# EAGLE board 8-Fach-PCB v33 (EAGLE 9.7.0)
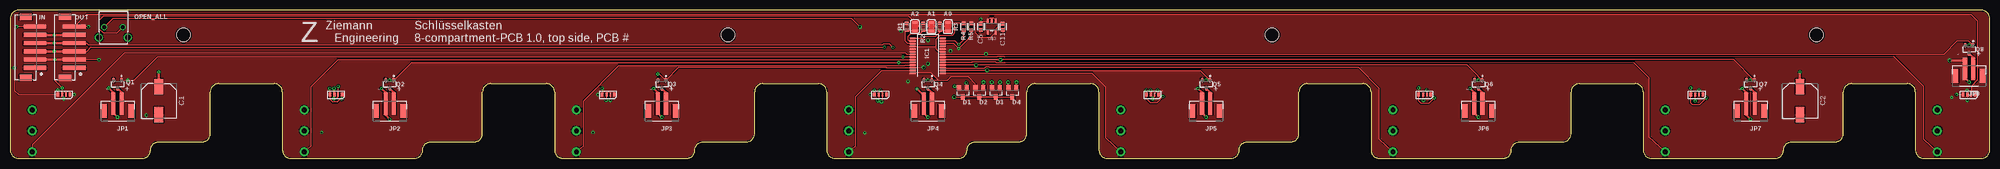
[diagram p0: board, top side]
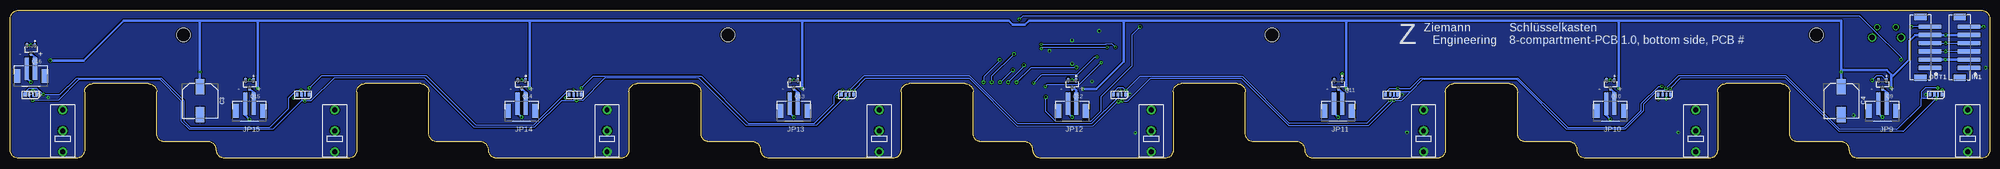
[diagram p1: board, bottom side, seen from below]

Size 480 x 36 mm. Coordinates in mm from the lower left corner, seen from the top.
Outline: 432,4 442.5,4 arc90 444.5,6 444.5,16.16 arc-90 446.5,18.16 460,18.16 arc-90 462,16.16 462,2 arc90 464,0 478,0 arc90 480,2 480,34 arc90 478,36 2,36 arc90 0,34 0,2 arc90 2,0 32,0 arc90 34,2 arc-90 36,4 46.5,4 arc90 48.5,6 48.5,16.16 arc-90 50.5,18.16 64,18.16 arc-90 66,16.16 66,2 arc90 68,0 98,0 arc90 100,2 arc-90 102,4 112.5,4 arc90 114.5,6 114.5,16.16 arc-90 116.5,18.16 130,18.16 arc-90 132,16.16 132,2 arc90 134,0 164,0 arc90 166,2 arc-90 168,4 178.5,4 arc90 180.5,6 180.5,16.16 arc-90 182.5,18.16 196,18.16 arc-90 198,16.16 198,2 arc90 200,0 230,0 arc90 232,2 arc-90 234,4 244.5,4 arc90 246.5,6 246.5,16.16 arc-90 248.5,18.16 262,18.16 arc-90 264,16.16 264,2 arc90 266,0 296,0 arc90 298,2 arc-90 300,4 310.5,4 arc90 312.5,6 312.5,16.16 arc-90 314.5,18.16 328,18.16 arc-90 330,16.16 330,2 arc90 332,0 362,0 arc90 364,2 arc-90 366,4 376.5,4 arc90 378.5,6 378.5,16.16 arc-90 380.5,18.16 394,18.16 arc-90 396,16.16 396,2 arc90 398,0 428,0 arc90 430,2 arc-90 432,4
Copper layers (1*16): Top / Bottom
Stack-up Default Layer Stack: Top User Defined 0.035mm / Dielectric-1 User Defined 1.5mm / Bottom User Defined 0.035mm
Design rules "aisler_2_layer_simple *": minimum track width 0.2mm, minimum drill 0.3mm, track to track 0.175mm, track to pad 0.175mm, pad to pad 0.175mm, via to via 0.175mm, smd to smd 0.175mm, copper to edge 0.3mm, drill to drill 0.25mm, minimum pad ring 0.2mm, minimum via ring 0.2mm, stop-mask expansion 0mil, vias tented up to drill 0mil, thermal gap 10mil
Holes 3.3 mm at 42,30 174,30 306,30 438,30

## Footprints (pad centres in the part's own frame; a part is rotated, then mirrored left to right if it is on the bottom)
SOLDERJUMPER_ARROW_NOPASTE = smd 0.762 x 1.524: 1 -1.016,0; 2 1.016,0
CAPAE830X1050N = smd 3.764 x 2.115: 1 -3.426,0; 2 3.426,0
CAPC1608X85 = smd 0.921 x 0.97: 1 -0.775,0; 2 0.775,0
SOT23 = smd 1 x 1.4: 1 -0.95,-1.1; 2 0.95,-1.1; 3 0,1.1
SSOP28 = smd 0.4 x 1.5: 1 -4.225,-3.625; 2 -3.575,-3.625; 3 -2.925,-3.625; 4 -2.275,-3.625; 5 -1.625,-3.625; 6 -0.975,-3.625; 7 -0.325,-3.625; 8 0.325,-3.625; 9 0.975,-3.625; 10 1.625,-3.625; 11 2.275,-3.625; 12 2.925,-3.625; 13 3.575,-3.625; 14 4.225,-3.625; 15 4.225,3.625; 16 3.575,3.625; 17 2.925,3.625; 18 2.275,3.625; 19 1.625,3.625; 20 0.975,3.625; 21 0.325,3.625; 22 -0.325,3.625; 23 -0.975,3.625; 24 -1.625,3.625; 25 -2.275,3.625; 26 -2.925,3.625; 27 -3.575,3.625; 28 -4.225,3.625
JST_B6B-PH-SM4-TB(LF)(SN) = smd 1 x 5.5: 1 -5,0; 2 -3,0; 3 -1,0; 4 1,0; 5 3,0; 6 5,0 | smd 1.6 x 3: P1 -7.4,2.25; P2 7.4,2.25
JST-PH-2-SMT = smd 1 x 5.5: 1 -1,-1.8; 2 1,-1.8 | smd 1.6 x 3.4: NC1 -3.4,0; NC2 3.4,0
4020 = smd 0.75 x 0.8: DIN 0,0 | smd 0.4 x 0.8: DOUT 2.005,0 | smd 0.8 x 0.8: GND 2.985,0 | smd 0.6 x 0.8: VDD 1.125,0
1571610-2 = drill 1: 1 -2.25,0; 2 2.25,0 | drill 1.3: 3 -3.5,-2.5; 4 3.5,-2.5
SOT23-3 = smd 0.62 x 1.1: 1 -0.95,-0.975; 2 0.95,-0.975; 3 0,0.975
RESC1608X60 = smd 0.799 x 0.974: 1 -0.815,0; 2 0.815,0
OMRON_D2F = drill 1.2 pad 2.184: P$1 -5.08,0; P$2 0,0; P$3 5.08,0
SOT23-5 = smd 0.55 x 1.2: 1 -0.95,-1.3; 2 0,-1.3; 3 0.95,-1.3; 4 0.95,1.3; 5 -0.95,1.3

## Placement (x,y rotation side)
A0  [SOLDERJUMPER_ARROW_NOPASTE]  227.4,32 90 top
A1  [SOLDERJUMPER_ARROW_NOPASTE]  223.4,32 90 top
A2  [SOLDERJUMPER_ARROW_NOPASTE]  219.36,32 90 top
C1  [CAPAE830X1050N]  36,14 270 top
C2  [CAPAE830X1050N]  434,14 270 top
C3  [CAPAE830X1050N]  434,14 270 bottom
C4  [CAPAE830X1050N]  36,14 270 bottom
C5  1u  [CAPC1608X85]  235.3,32 90 top
C11  1u  [CAPC1608X85]  240.7,32 90 top
D1  BAT54A  [SOT23]  231,16 180 top
D2  BAT54A  [SOT23]  235,16 180 top
D3  BAT54A  [SOT23]  239,16 180 top
D4  BAT54A  [SOT23]  243,16 180 top
IC1  MCP23017SS  [SSOP28]  222.5,24.93 90 top
IN  B6B-PH-SM4-TB(LF)(SN)  [JST_B6B-PH-SM4-TB(LF)(SN)]  6,27 90 top
IN1  B6B-PH-SM4-TB(LF)(SN)  [JST_B6B-PH-SM4-TB(LF)(SN)]  5,27 90 bottom
JP1  [JST-PH-2-SMT]  26,11.5 180 top
JP2  [JST-PH-2-SMT]  92,11.5 180 top
JP3  [JST-PH-2-SMT]  158,11.5 180 top
JP4  [JST-PH-2-SMT]  222.5,11.5 180 top
JP5  [JST-PH-2-SMT]  290,11.5 180 top
JP6  [JST-PH-2-SMT]  356,11.5 180 top
JP7  [JST-PH-2-SMT]  422,11.5 180 top
JP8  [JST-PH-2-SMT]  475,20 180 top
JP9  [JST-PH-2-SMT]  26,11.5 180 bottom
JP10  [JST-PH-2-SMT]  92,11.5 180 bottom
JP11  [JST-PH-2-SMT]  158,11.5 180 bottom
JP12  [JST-PH-2-SMT]  222.5,11.5 180 bottom
JP13  [JST-PH-2-SMT]  290,11.5 180 bottom
JP14  [JST-PH-2-SMT]  356,11.5 180 bottom
JP15  [JST-PH-2-SMT]  422,11.5 180 bottom
JP16  [JST-PH-2-SMT]  475,20 180 bottom
LED1  SK6812  [4020]  11.5,15.5 0 top
LED2  SK6812  [4020]  77.5,15.5 0 top
LED3  SK6812  [4020]  143.5,15.5 0 top
LED4  SK6812  [4020]  209.5,15.5 0 top
LED5  SK6812  [4020]  275.5,15.5 0 top
LED6  SK6812  [4020]  341.5,15.5 0 top
LED7  SK6812  [4020]  407.5,15.5 0 top
LED8  SK6812  [4020]  473.5,15.5 0 top
LED9  SK6812  [4020]  80.4,15.5 0 bottom
LED10  SK6812  [4020]  14.5,15.5 0 bottom
LED11  SK6812  [4020]  146.5,15.5 0 bottom
LED12  SK6812  [4020]  212.5,15.5 0 bottom
LED13  SK6812  [4020]  278.5,15.5 0 bottom
LED14  SK6812  [4020]  344.5,15.5 0 bottom
LED15  SK6812  [4020]  410.5,15.5 0 bottom
LED16  SK6812  [4020]  476.5,15.5 0 bottom
OPEN_ALL  1571610-2  [1571610-2]  25,31.88 0 top
OUT  B6B-PH-SM4-TB(LF)(SN)  [JST_B6B-PH-SM4-TB(LF)(SN)]  15.5,27 90 top
OUT1  B6B-PH-SM4-TB(LF)(SN)  [JST_B6B-PH-SM4-TB(LF)(SN)]  14.5,27 90 bottom
Q1  MOSFET-N  [SOT23-3]  26,18 180 top
Q2  MOSFET-N  [SOT23-3]  92,18 180 top
Q3  MOSFET-N  [SOT23-3]  158,18 180 top
Q4  MOSFET-N  [SOT23-3]  222.5,18 180 top
Q5  MOSFET-N  [SOT23-3]  290,18 180 top
Q6  MOSFET-N  [SOT23-3]  356,18 180 top
Q7  MOSFET-N  [SOT23-3]  422,18 180 top
Q8  MOSFET-N  [SOT23-3]  475,26.5 180 top
Q9  MOSFET-N  [SOT23-3]  26,18 180 bottom
Q10  MOSFET-N  [SOT23-3]  92,18 180 bottom
Q11  MOSFET-N  [SOT23-3]  158,18 180 bottom
Q12  MOSFET-N  [SOT23-3]  222.5,18 180 bottom
Q13  MOSFET-N  [SOT23-3]  290,18 180 bottom
Q14  MOSFET-N  [SOT23-3]  356,18 180 bottom
Q15  MOSFET-N  [SOT23-3]  422,18 180 bottom
Q16  MOSFET-N  [SOT23-3]  475,26.5 180 bottom
R1  10k  [RESC1608X60]  217.4,32 270 top
R2  10k  [RESC1608X60]  221.4,32 270 top
R3  10k  [RESC1608X60]  225.4,32 270 top
R4  10k  [RESC1608X60]  231.2,32 90 top
R5  10k  [RESC1608X60]  233,32 90 top
S1  SWITCH_SPST  [OMRON_D2F]  5.3,6.7 90 bottom
S2  SWITCH_SPST  [OMRON_D2F]  71.3,6.7 90 bottom
S3  SWITCH_SPST  [OMRON_D2F]  137.3,6.7 90 bottom
S4  SWITCH_SPST  [OMRON_D2F]  203.3,6.7 90 bottom
S5  SWITCH_SPST  [OMRON_D2F]  269.3,6.7 90 bottom
S6  SWITCH_SPST  [OMRON_D2F]  335.3,6.7 90 bottom
S7  SWITCH_SPST  [OMRON_D2F]  401.3,6.7 90 bottom
S8  SWITCH_SPST  [OMRON_D2F]  467.3,6.7 90 bottom
U$1  [ZELOGO_NAME]  73.1,28.3 0 top
U$2  [ZELOGO_NAME]  140.6,27.8 0 bottom
U$3  MIC550XSOT-23-5  [SOT23-5]  238,32 180 top

## Library data of the parts
A0 A1 A2 = microbuilder; BOM: EXCLUDE
C1-C5 C11 = Capacitor; CATEGORY: Capacitor
D1-D4 = diode
IC1 = adafruit
IN IN1 OUT OUT1 = B6B-PH-SM4-TB_LF__SN_; MANUFACTURER: JST
JP1-JP16 LED1-LED16 U$3 = MAS AT PCB library v11
OPEN_ALL = Switch; CREATED_BY: PCBLayout.com; DIGIKEY_PN: A117269-ND; MANUFACTURER: TE Connectivity ALCOSWITCH Switches; MPN: 1571610-2
Q1-Q16 = MAS AT PCB library; CREATED_BY: PCBLayout.com; DIGIKEY_PART_NUMBER: 1727-2764-1-ND; MANUFACTURER: Nexperia USA Inc.; MPN: 2N7002,215; PACKAGE: SOT-23-3
R1-R5 = Resistor; CATEGORY: Resistor; SUB-CATEGORY: Fixed
S1-S8 = ZE PCB lib v51
U$1 U$2 = ZE PCB lib

## Nets
3V3: A0.2 A1.2 A2.2 C11.2 IC1.9 IC1.18 OPEN_ALL.2 R4.2 R5.2 U$3.5
5V: C5.2 IN1.2 IN.2 LED1.VDD LED2.VDD LED3.VDD LED4.VDD LED5.VDD LED6.VDD LED7.VDD LED8.VDD LED9.VDD LED10.VDD LED11.VDD LED12.VDD LED13.VDD LED14.VDD LED15.VDD LED16.VDD OUT1.2 OUT.2 U$3.1 U$3.3
A0: A0.1 IC1.15 R3.2
A1: A1.1 IC1.16 R2.2
A2: A2.1 IC1.17 R1.2
GND: C1.2 C2.2 C3.2 C4.2 C5.1 C11.1 IC1.10 IN1.1 IN.1 LED1.GND LED2.GND LED3.GND LED4.GND LED5.GND LED6.GND LED7.GND LED8.GND LED9.GND LED10.GND LED11.GND LED12.GND LED13.GND LED14.GND LED15.GND LED16.GND OPEN_ALL.3 OPEN_ALL.4 OUT1.1 OUT.1 Q1.2 Q2.2 Q3.2 Q4.2 Q5.2 Q6.2 Q7.2 Q8.2 Q9.2 Q10.2 Q11.2 Q12.2 Q13.2 Q14.2 Q15.2 Q16.2 R1.1 R2.1 R3.1 S1.P$2 S2.P$2 S3.P$2 S4.P$2 S5.P$2 S6.P$2 S7.P$2 S8.P$2 U$3.2
I1: IC1.21 S1.P$1
I2: IC1.23 S2.P$1
I3: IC1.25 S3.P$1
I4: IC1.27 S4.P$1
I5: IC1.1 S5.P$1
I6: IC1.3 S6.P$1
I7: IC1.5 S7.P$1
I8: IC1.7 S8.P$1
LED_IN: IN1.6 IN.6 LED1.DIN LED10.DIN
LED_OUT: LED8.DOUT LED16.DOUT OUT1.6 OUT.6
N$1: JP2.1 Q2.3
N$2: D1.3 D2.3 D3.3 D4.3 OPEN_ALL.1
N$3: JP3.1 Q3.3
N$4: JP1.1 Q1.3
N$5: LED7.DOUT LED8.DIN LED15.DOUT LED16.DIN
N$6: LED6.DOUT LED7.DIN LED14.DOUT LED15.DIN
N$9: JP4.1 Q4.3
N$10: JP5.1 Q5.3
N$11: JP6.1 Q6.3
N$12: JP7.1 Q7.3
N$13: JP8.1 Q8.3
N$19: JP9.1 Q9.3
N$20: JP10.1 Q10.3
N$21: JP11.1 Q11.3
N$22: JP12.1 Q12.3
N$23: JP13.1 Q13.3
N$24: JP14.1 Q14.3
N$25: JP15.1 Q15.3
N$26: JP16.1 Q16.3
N$32: LED1.DOUT LED2.DIN LED9.DIN LED10.DOUT
N$34: LED5.DOUT LED6.DIN LED13.DOUT LED14.DIN
N$35: LED4.DOUT LED5.DIN LED12.DOUT LED13.DIN
N$36: LED2.DOUT LED3.DIN LED9.DOUT LED11.DIN
N$37: LED3.DOUT LED4.DIN LED11.DOUT LED12.DIN
O1: D1.1 IC1.22 Q1.1 Q9.1
O2: D1.2 IC1.24 Q2.1 Q10.1
O3: D2.1 IC1.26 Q3.1 Q11.1
O4: D2.2 IC1.28 Q4.1 Q12.1
O5: D3.1 IC1.2 Q5.1 Q13.1
O6: D3.2 IC1.4 Q6.1 Q14.1
O7: D4.1 IC1.6 Q7.1 Q15.1
O8: D4.2 IC1.8 Q8.1 Q16.1
SCL: IC1.12 IN1.4 IN.4 OUT1.4 OUT.4 R5.1
SDA: IC1.13 IN1.3 IN.3 OUT1.3 OUT.3 R4.1
V+: C1.1 C2.1 C3.1 C4.1 IN1.5 IN.5 JP1.2 JP2.2 JP3.2 JP4.2 JP5.2 JP6.2 JP7.2 JP8.2 JP9.2 JP10.2 JP11.2 JP12.2 JP13.2 JP14.2 JP15.2 JP16.2 OUT1.5 OUT.5

## Tracks (layer width: path | path; a pad name or v marks a point on that pad's centre or on a via)
3V3
  Top 0.3: U$3.5 237.75,29.5 235.12,29.5 233.89,30.73 233.89,31.93 R5.2 R4.2 231,33.02 229,33.02 | U$3.5 239.07,30.7 | C11.2 239.82,31.9 239.4,31.9 238.95,31.45 U$3.5 | 229,33.02 A0.2 226.38,32 224.42,32 A1.2 223.4,32.9 222.5,32 220.37,32 A2.2 217.87,34.5 22.5,34.5 21.5,33.5 21.5,31.5 22.5,30.5 25.88,30.5 OPEN_ALL.2 | IC1.9 225.09,25.91 224.5,26.5 224.5,27.2 | 224.5,27.2 224.5,29 225.5,30 228.5,30 229,30.5 229,33.02 | IC1.18 224.49,27.21 224.5,27.2
5V  (via drill 0.3 pad 0.7, 0.35)
  Top 0.3: v10.78,24 10.78,18.93 v12.6,17.1 12.62,17.07 LED1.VDD | LED2.VDD 78.5,15.62 v78.5,17 | LED3.VDD 144.47,15.65 v144.47,14.1 | 210.5,15.62 LED4.VDD 210.6,15.47 210.6,14.26 v210.34,14 | v276.5,16.5 276.62,16.38 LED5.VDD | v342.7,14.1 342.62,14.18 LED6.VDD | v408.6,13.9 408.6,15.47 LED7.VDD | 474.5,15.62 LED8.VDD 474.6,15.47 v474.6,14.1 | v21.5,24 OUT.2 | v235.3,33.8 C5.2 235.83,33.3 U$3.3 237.05,33.69 237.59,34.23 238.41,34.23 238.95,33.69 U$3.1
  Top 0.6: OUT.2 v10.78,24 IN.2
  Bottom 0.3: v12.6,17.1 15.6,17.1 16.6,16.1 16.6,14.5 | 16.6,14.5 16.6,12.9 22.5,7 36.33,7 49.33,20 75.5,20 v78.5,17 79,16.5 | 79,16.5 79.28,16.23 LED9.VDD | 140.4,16.3 142.6,14.1 v144.47,14.1 150.57,8 170,8 181.5,19.5 203.5,19.5 209.05,13.95 210.29,13.95 v210.34,14 210.34,14.04 211,14.7 211.3,14.7 | 140.4,16.3 137.59,19.11 114.61,19.11 102.53,7.03 88.44,7.03 84,11.47 84,13.1 80.6,16.5 79,16.5 | 343.4,14 342.8,14 v342.7,14.1 341.2,14.1 335.8,19.5 313,19.5 301.5,8 284.5,8 277.38,15.12 LED13.VDD 277.38,15.66 276.54,16.5 v276.5,16.5 273.02,19.98 247.3,19.98 235.73,8.4 217.83,8.4 211.38,14.85 LED12.VDD | 343.4,14 346.4,14 352.9,7.5 367.5,7.5 379.5,19.5 401.5,19.5 407.1,13.9 v408.6,13.9 409.4,13.9 | 409.4,13.9 416.3,7 436.5,7 438.5,9 438.5,14 443.61,19.11 463.39,19.11 468.4,14.1 v474.6,14.1 475.38,14.88 LED16.VDD | LED15.VDD 409.38,13.93 409.4,13.9 | LED11.VDD 145.38,16.02 145.1,16.3 140.4,16.3 | LED10.VDD 13.38,15.3 14.18,14.5 16.6,14.5 | LED14.VDD 343.38,14.03 343.4,14 | LED12.VDD 211.38,14.78 211.3,14.7 | LED12.VDD 211.3,15.43 211.3,14.7 | v235.3,33.8 234.4,34.7 31.57,34.7 28.32,31.45 28.32,31.43 21.5,24.61 v21.5,24
  Bottom 0.6: IN.2 IN1.2 OUT1.2
A0
  Top 0.3: 225.6,30.98 A0.1 | 225.6,30.98 225.38,30.98 | 225.6,30.98 R3.2 225.4,30.68 224.28,29.56 221.64,29.56 221.24,29.16 IC1.15
A1
  Top 0.3: 221.85,30.98 A1.1 221.6,30.98 R2.2 221.4,31.04 220.58,30.22 218.22,30.22 217.6,29.6 217.6,28.9 217.99,28.51 IC1.16
A2
  Top 0.3: A2.1 217.6,30.98 R1.2 217,30.79 217,28.5 217.64,27.86 IC1.17
GND  (via drill 0.35, 0.45)
  Top 0.3: LED5.GND 279.49,16.5 279.5,16.5
  other vias: 222.5,23 222.55,28.71 228,26.1 215.94,30.95 33,10.5 75.5,6.3 141.3,6.3 207.2,6.2 217.7,18.7 142.5,15.5 15.5,15.5 208.5,15.5 470.8,14.8
  pour Top: 480,48 495,33 495,-11 491,-15 -18,-15 -18,45
  pour Bottom: -16,47 481,47 494,34 494,-11 491,-14 -14,-14 -16,-12 -16,45 -14,47
I1
  Top 0.3: IC1.21 217.51,25.26 217.16,25.61 27.59,25.61 5.3,3.32 S1.P$1
I2
  Top 0.3: S2.P$1 73,3.08 73,17.5 79.5,24 216,24 216.04,23.96 IC1.23
I3
  Top 0.3: S3.P$1 139,3.08 139,14 147.6,22.6 216.93,22.6 216.99,22.66 IC1.25
I4
  Top 0.3: S4.P$1 205,3.08 205,15 211.36,21.36 IC1.27
I5
  Top 0.3: S5.P$1 265.5,5.08 265.5,17.5 262.29,20.71 IC1.1
I6
  Top 0.3: S6.P$1 332,4.58 332,17 326.94,22.06 237.56,22.06 237.41,22.21 236.49,22.21 236.16,21.88 226.25,21.88 IC1.3
I7
  Top 0.3: S7.P$1 397.5,5.08 397.5,19.5 393.79,23.21 241.2,23.3 241.11,23.21 239.16,23.21 238.99,23.38 233.18,23.38 233.11,23.31 IC1.5
I8
  Top 0.3: S8.P$1 464,4.58 464,17.5 456.79,24.71 241.1,24.6 240.99,24.71 239.29,24.71 239.19,24.61 IC1.7
LED_IN  (via drill 0.35)
  Top 0.3: IN.6 v1.5,32 1,31.5 v1,22 1,16.5 2,15.5 LED1.DIN v11.5,16.6
  Bottom 0.3: IN1.6 v1.5,32 | LED10.DIN 14.5,15.8 14,16.3 11.8,16.3 v11.5,16.6
LED_OUT  (via drill 0.35)
  Top 0.3: 475.5,16.5 475.5,17.5 477,19 477,33.5 475.43,35.08 18.57,35.08 OUT.6 v19,32 | 475.5,16.5 LED8.DOUT | v474.5,16.45 475.45,16.45 475.5,16.5
  Bottom 0.3: OUT1.6 v19,32 | LED16.DOUT v474.5,16.45
N$1
  Top 0.6: JP2.1 93,16.02 Q2.3
N$2  (via drill 0.45)
  Top 0.3: D3.3 D1.3 v228.9,14.9 | D3.3 D4.3 | D2.3 D3.3 | v206,32 204.05,33.95 24.82,33.95 OPEN_ALL.1
  Bottom 0.3: v206,32 208,30 208,22.49 215.59,14.9 215.59,11.41 218,9 226.5,9 228.9,11.4 v228.9,14.9
N$3
  Top 0.6: JP3.1 159,16.02 Q3.3
N$4
  Top 0.6: JP1.1 27,16.02 Q1.3
N$5  (via drill 0.35)
  Top 0.3: LED7.DOUT v409.5,16.5 | v472,15.5 LED8.DIN
  Bottom 0.3: LED15.DOUT 408.5,16 409,16.5 v409.5,16.5 410.7,16.5 412.48,14.73 412.48,12.16 417.14,7.5 436.32,7.5 437.88,9.06 437.88,14.05 443.41,19.58 463.92,19.58 468,15.5 v472,15.5 473.65,17.15 475.35,17.15 476.5,16 LED16.DIN
N$6  (via drill 0.35)
  Top 0.3: LED6.DOUT v343.5,16.5 | v407.5,17.1 LED7.DIN 407.5,13.5 408,13 409.6,13 v411.3,14.7
  Bottom 0.3: v407.5,17.1 404.6,20 379,20 367,8 353.14,8 351.48,9.66 351.48,9.73 344.7,16.5 v343.5,16.5 343,16.5 342.5,16 LED14.DOUT | LED15.DIN v411.3,14.7
N$9
  Top 0.6: JP4.1 223.5,16.02 Q4.3
N$10
  Top 0.6: JP5.1 291,16.02 Q5.3
N$11
  Top 0.6: JP6.1 357,16.02 Q6.3
N$12
  Top 0.6: JP7.1 423,16.02 Q7.3
N$13
  Top 0.6: JP8.1 476,24.52 Q8.3
N$19
  Bottom 0.3: JP9.1 25,14.5
  Bottom 0.6: Q9.3 25,16.02 25,14.5
N$20
  Bottom 0.61: Q10.3 91,16.02 JP10.1
N$21
  Bottom 0.61: Q11.3 157,16.02 JP11.1
N$22
  Bottom 0.6: JP12.1 221.5,16.5 222.03,17.02 Q12.3
N$23
  Bottom 0.61: Q13.3 289,16.02 JP13.1
N$24
  Bottom 0.61: Q14.3 355,16.02 JP14.1
N$25
  Bottom 0.61: Q15.3 421,16.02 JP15.1
N$26
  Bottom 0.61: Q16.3 474,24.52 JP16.1
N$32  (via drill 0.35)
  Top 0.3: LED1.DOUT 13.51,15.01 v13,14.5 | v77.5,17 LED2.DIN 77.5,14.4 78.2,13.7 79.3,13.7 80,14.4 v80.4,14.4
  Bottom 0.3: v77.5,17 75,19.5 49.5,19.5 36.5,6.5 21,6.5 v13,14.5 12.5,15 LED10.DOUT | v80.4,14.4 LED9.DIN
N$34  (via drill 0.35)
  Top 0.3: v278.2,16.5 277.5,15.8 LED5.DOUT 277.5,15.01 v277,14.5 | v341.5,17.1 LED6.DIN 341.5,14 342.1,13.4 344,13.4 v345.3,14.7
  Bottom 0.3: v341.5,17.1 338.6,20 312.5,20 301,8.5 285,8.5 280.2,13.3 280.2,15.29 278.96,16.52 278.23,16.52 v278.2,16.5 | LED13.DOUT 276.5,15.01 v277,14.5 | LED14.DIN v345.3,14.7
N$35  (via drill 0.35)
  Top 0.3: v275.5,16.5 LED5.DIN 275.5,14.5 276.5,13.5 278,13.5 v279.5,15 | v211,16.5 211.5,15.99 LED4.DOUT 211.5,13.98 v211.27,13.74
  Bottom 0.3: v275.5,16.5 272.5,19.5 247.5,19.5 235.93,7.92 217.4,7.92 211.59,13.74 v211.27,13.74 | LED12.DOUT 210.5,15.99 v211,16.5 | LED13.DIN 279,15 v279.5,15
N$36  (via drill 0.35)
  Top 0.3: v79.5,17.5 LED2.DOUT 79.5,15.01 79,14.5 v78.4,14.5 | v143.5,17 LED3.DIN
  Bottom 0.3: LED11.DIN 146.5,16 145.5,17 v143.5,17 140.5,17 137.92,19.58 114.41,19.58 102.33,7.5 88.64,7.5 84.47,11.66 84.47,13.3 80.27,17.5 v79.5,17.5 | LED9.DOUT v78.39,14.51 v78.4,14.5
N$37  (via drill 0.35)
  Top 0.3: LED3.DOUT v145.5,14.1 | LED4.DIN v209.5,16.5
  Bottom 0.3: LED11.DOUT 144.5,15.2 145.5,14.2 v145.5,14.1 151,8.6 169.93,8.6 181.3,19.98 206.03,19.98 v209.5,16.5 210.2,17.2 211.3,17.2 212.5,16 LED12.DIN
O1  (via drill 0.3 pad 0.7, 0.35)
  Top 0.3: Q1.1 v28.5,18.98 29.95,18.98 35.63,24.66 216.46,24.66 v216.48,24.64 216.51,24.61 IC1.22 | D1.1 231.95,18.25 v231.85,18.35
  Bottom 0.3: Q9.1 26.07,20 27.5,20 28.5,19 v28.5,18.98 | v216.48,24.64 216.98,24.64 221.27,20.35 229.84,20.35 v231.85,18.35
O2  (via drill 0.3 pad 0.7, 0.35)
  Top 0.3: D1.2 229.65,17.5 v229,17.5 | IC1.24 215.5,23.31 v215.47,23.28 215.41,23.33 97.31,23.33 Q2.1 92.92,19 v92,19
  Bottom 0.3: v229,17.5 228.5,18 220.75,18 v215.47,23.28 | v92,19 91.08,19 Q10.1
O3  (via drill 0.35, 0.45)
  Top 0.3: D2.1 235.95,18.45 v236,18.5 | v221.5,22.08 221.5,22.01 IC1.26 212.5,22.01 161.99,22.01 Q3.1 157.43,20.5 v157,20.5
  Bottom 0.3: v221.5,22.08 232.43,22.08 v236,18.51 v236,18.5 | Q11.1 157.05,20.45 v157,20.5
O4  (via drill 0.35)
  Top 0.3: 225.09,18.9 223.28,20.71 IC1.28 | 225.09,18.9 223.5,18.9 223.5,18.93 Q4.1 223.43,19 v222.5,19 | 225.09,18.9 227.23,18.9 228.06,19.73 232.42,19.73 234.05,18.1 D2.2
  Bottom 0.3: Q12.1 221.57,19 v222.5,19
O5  (via drill 0.35, 0.45)
  Top 0.3: D3.1 239.95,18.45 v240,18.5 | IC1.2 236.8,21.36 v236.9,21.46 236.97,21.38 288.54,21.38 Q5.1 290.93,19 v290,19
  Bottom 0.3: v240,18.5 239.93,18.43 v236.9,21.46 | Q13.1 289.07,19 v290,19
O6  (via drill 0.35, 0.45)
  Top 0.3: D3.2 238,17.15 v238,18.5 | IC1.4 234.18,22.66 v234.2,22.63 234.25,22.68 353.32,22.68 354.98,21.02 Q6.1 356.93,19 v356,19
  Bottom 0.3: v238,18.5 234.2,22.3 v234.2,22.63 | Q14.1 355.98,18.98 v356,19
O7  (via drill 0.35, 0.45)
  Top 0.3: D4.1 243.95,18.45 v244,18.5 | v240.1,23.96 IC1.6 417.97,23.96 Q7.1 422.93,19 v421.91,19
  Bottom 0.3: v244,18.5 244,19.8 240.1,23.7 v240.1,23.96 | Q15.1 421.48,18.98 421.5,19 v421.91,19
O8  (via drill 0.35, 0.45)
  Top 0.3: 236.47,25.26 468.84,25.26 472.06,28.48 474.95,28.48 Q8.1 475.93,27.5 v475,27.5 | D4.2 242.05,18.45 v242,18.5 | 236.47,25.26 IC1.8 | v236.6,25.36 236.6,25.38 236.47,25.26
  Bottom 0.3: v242,18.5 242,19.96 v236.6,25.36 | Q16.1 474.98,27.48 v475,27.5
SCL  (via drill 0.3 pad 0.7, 0.35)
  Top 0.3: OUT.4 18.5,28 19.02,27.48 211.42,27.48 211.69,27.75 213.25,27.75 v214.03,26.98 | IC1.12 228.84,27.86 v230,26.7 233,29.7 R5.1 | IN.4 v10.7,28
  Top 0.6: OUT.4 IN.4
  Bottom 0.3: v230,26.7 229.72,26.98 v214.03,26.98 | IN1.4 v10.7,28 OUT1.4
SDA  (via drill 0.3 pad 0.7, 0.35)
  Top 0.3: v212,27 19.5,27 18.5,26 OUT.3 | IC1.13 229.19,28.51 v230,27.7 | v230,27.7 230.08,27.78 | v230,27.7 231.2,28.9 R4.1
  Top 0.6: IN.3 v10.7,26 OUT.3
  Bottom 0.3: v230,27.7 214.36,27.7 214.34,27.73 212.72,27.73 v212,27 | IN1.3 v10.7,26 OUT1.3
V+  (via drill 0.3 pad 0.7, 0.35, 0.45)
  Top 0.3: 11,30 v10.7,30
  Top 0.6: JP1.2 25,16 v23.9,17.1 | JP7.2 421,13.5 421,16 v420,17 | JP6.2 355,16 v354,17 | JP5.2 289,16 v288,17 | JP3.2 157,16 v156,17 | JP2.2 91,13.5 91,16 v90,17 | v470.3,23.8 470.32,23.78 474,23.78 JP8.2 | 434,21.02 v434,21 C2.1 | IN.5 v10.7,30 | 11,30 OUT.5 | JP4.2 221.5,15.24 v219.87,16.87 | C1.1 v36,21
  Top 0.61: v158,10 157,11 JP3.2 | v92,9.5 91,10.5 91,13.5 | v26,10 25,11 JP1.2 | v222.5,10 221.5,11 JP4.2 | v290,10 289,11 JP5.2 | v356,10 355,11 JP6.2 | v422,9.5 421,10.5 421,13.5 | v475,18.5 474,19.5 JP8.2
  Bottom 0.6: 90,33.5 36,33.5 v36,21 | 156,33.5 90,33.5 | 434,33.5 452.5,33.5 462.25,23.75 462.3,23.8 v470.3,23.8 | 434,33.5 420,33.5 | 420,33.5 354,33.5 | 354,33.5 288,33.5 | 210,33.5 232.96,33.5 233.96,32.5 236.9,32.5 237.9,33.5 288,33.5 | 210,33.5 156,33.5 | 156,33.5 v156,17 | 90,33.5 v90,17 | C2.1 v434,21 434,33.5 | 420,33.5 v420,17 | 354,33.5 v354,17 | v288,17 288,33.5 | v36,21 C1.1 | v219.87,16.87 216.63,16.87 210,23.5 210,33.5 | v36,21 35.5,21.5 25,21.5 23.9,20.4 23.9,19.6 | 23.9,19.6 v23.9,17.1 | 23.9,19.6 19.5,24 19.5,28.5 18,30 OUT1.5 v10.7,30 IN1.5
  Bottom 0.61: JP11.2 159,11 v158,10 | JP10.2 93,10.5 v92,9.5 | JP9.2 27,11 v26,10 | JP12.2 223.5,11 v222.5,10 | JP13.2 291,11 v290,10 | JP14.2 357,11 v356,10 | JP15.2 423,10.5 v422,9.5 | JP16.2 476,19.5 v475,18.5

## Text on the board
tNames: Schlüsselkasten / 8-compartment-PCB 1.0, top side, PCB #
bNames: Schlüsselkasten / 8-compartment-PCB 1.0, bottom side, PCB #